# Altium PCB STM 32 F4 Robusta V1.PcbDoc (part 2 of 7)
Units mm, origin at the board's own origin, x right, y up, seen from the top; angles counter-clockwise.
Board outline 287.78 x 230 mm, 2 copper layers (Top Layer, Bottom Layer); 54 components, 96 nets, 355 pads, 16 vias.
Unrouted connection lines stored in the file: 3.
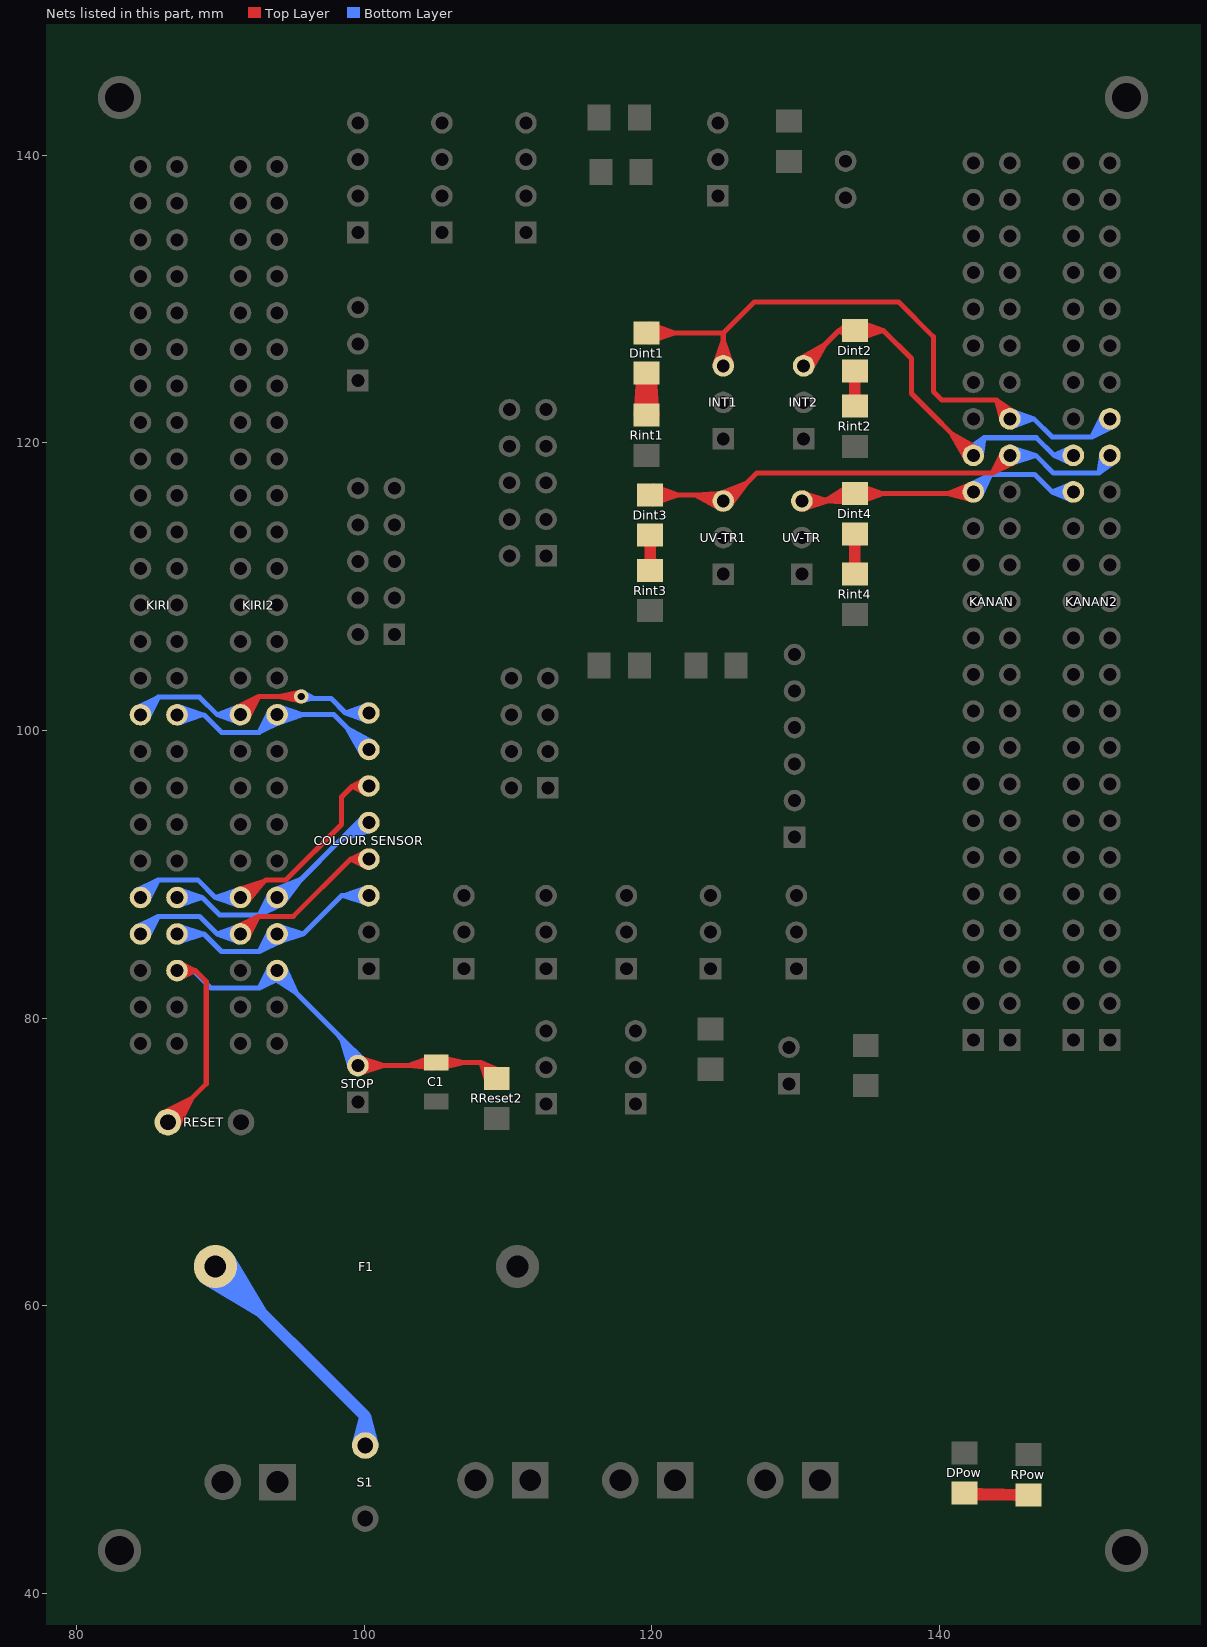
[diagram p2: the nets of this part, all layers, seen from the top]

## Via types
v1: diameter 1, hole 0.5, Top Layer to Bottom Layer, 13 vias
v2: diameter 0.8, hole 0.5, Top Layer to Bottom Layer, 3 vias

## Nets (pads, with @x,y where several pads share a name; then routed paths per layer and width w, separated by ;. In a path a pad name is that pad's centre, name@x,y a point inside that pad or via, vN(x,y) a via of type N, cw(c..) or ccw(c..) an arc to the next point about the centre after c; other vN are vias at no path point) (continued)
NetC1_2: C1.2 KIRI2.5 KIRI.5 RESET.2 RReset2.1 STOP.1 | length 232
  Top Layer w0.35: RESET.2@85.921,73.379 88.027,74.438 ; RESET.2@85.969,73.411 87.265,73.764 ; RESET.2@86.029,73.444 87.353,73.676 ; RESET.2@86.102,73.077 88.027,74.438 ; RESET.2@86.108,73.082 87.265,73.764 ; RESET.2@86.137,73.103 87.353,73.676 ; RESET.2@86.36,73.171 ccw(c86.36,74.137) 87.043,73.454 ccw(c87.726,72.771) RESET.2@86.76,72.771 ; RESET.2@86.36,73.521 ccw(c86.36,75.332) 87.64,74.051 ccw(c88.921,72.771) RESET.2@87.11,72.771 ; RESET.2@86.666,72.513 88.027,74.438 ; RESET.2@86.671,72.519 87.353,73.676 ; RESET.2@86.692,72.548 87.265,73.764 ; RESET.2@86.968,72.332 88.027,74.438 ; RESET.2@87,72.38 87.353,73.676 ; KIRI.5@87.008,83.087 87.907,83.253 ; KIRI.5@87.008,83.537 87.907,83.371 ; KIRI.5@87.015,83.088 88.265,83.312 ; KIRI.5@87.015,83.536 88.265,83.312 ; RESET.2@87.033,72.44 87.265,73.764 ; KIRI.5@87.037,83.091 87.907,83.371 ; KIRI.5@87.037,83.533 87.907,83.253 ; KIRI.5@87.125,82.752 88.265,83.312 ; KIRI.5@87.125,83.872 88.265,83.312 ; KIRI.5@87.14,82.756 87.907,83.253 ; KIRI.5@87.14,83.868 87.907,83.371 ; KIRI.5@87.211,82.779 87.907,83.371 ; KIRI.5@87.211,83.845 87.907,83.253 ; KIRI.5@87.427,82.933 cw(c88.265,82.197) 88.265,83.312 ; KIRI.5@87.427,83.691 ccw(c88.265,84.427) 88.265,83.312 ; STOP.1@99.603,76.486 100.597,76.755 ; STOP.1@99.603,76.93 100.597,76.661 ; STOP.1@99.66,76.14 101.368,76.708 ; STOP.1@99.66,77.276 101.368,76.708 ; STOP.1@99.703,76.149 100.597,76.661 ; STOP.1@99.703,77.267 100.597,76.755 ; STOP.1@99.754,76.164 100.597,76.755 ; STOP.1@99.754,77.252 100.597,76.661 ; STOP.1@99.975,76.301 cw(c100.956,75.32) 100.956,76.708 cw(c100.956,78.096) STOP.1@99.975,77.115 ; 103.324,76.708 ccw(c103.324,78.32) C1.2@104.464,77.18 ; 104.169,76.708 ccw(c104.169,77.475) C1.2@104.711,76.933 ; C1.2@104.603,77.268 103.741,76.763 ; C1.2@104.639,77.279 103.106,76.708 ; C1.2@104.716,76.54 103.741,76.763 ; C1.2@104.734,76.54 103.106,76.708 ; C1.2@104.822,76.708 STOP.1@99.568,76.708 ; C1.2@105.029,76.915 108.127,76.915 ; C1.2@105.373,76.543 106.929,76.915 ; C1.2@105.373,77.287 106.929,76.915 ; C1.2@105.417,76.55 106,76.884 ; C1.2@105.417,77.28 106,76.946 ; C1.2@105.45,76.56 106,76.946 ; C1.2@105.45,77.27 106,76.884 ; C1.2@105.594,76.65 cw(c106.234,76.01) 106.234,76.915 cw(c106.234,77.82) C1.2@105.594,77.18 ; 108.224,76.818 ccw(c109.12,77.714) RReset2.1@109.12,76.447 ; RReset2.1@108.498,75.882 ccw(c107.217,76.005) 108.127,76.915 ; RReset2.1@108.579,75.509 108.127,76.915 ; RReset2.1@108.9,75.657 108.127,76.915 ; RReset2.1@109.12,75.822 108.127,76.915 ; RReset2.1@109.22,75.822 108.127,76.915 ; RReset2.1@109.305,76.025 108.127,76.915 ; RReset2.1@109.483,76.331 108.127,76.915 ; RESET.2@86.36,72.771 87.353,73.676 ; RESET.2@86.36,72.771 87.265,73.764 ; RESET.2@86.36,72.771 89.027,75.438 89.027,82.55 88.265,83.312 ; KIRI.5@86.995,83.312 87.907,83.371 ; KIRI.5@86.995,83.312 87.907,83.253 ; KIRI.5@86.995,83.312 88.265,83.312 ; STOP.1@99.568,76.708 100.597,76.755 ; STOP.1@99.568,76.708 100.597,76.661 ; 100.597,76.661 99.582,76.483 101.368,76.708 ; 100.597,76.755 99.582,76.933 101.368,76.708 ; 103.106,76.708 104.729,76.915 103.741,76.763 ; C1.2@105.329,76.915 106.929,76.915 ; C1.2@105.329,76.915 106,76.946 ; C1.2@105.329,76.915 106,76.884
  Bottom Layer w0.35: KIRI.5@87.007,83.087 87.801,83.242 ; KIRI.5@87.007,83.537 87.801,83.382 ; KIRI.5@87.017,83.088 88.138,83.312 ; KIRI.5@87.017,83.536 88.138,83.312 ; KIRI.5@87.045,83.093 87.801,83.382 ; KIRI.5@87.045,83.531 87.801,83.242 ; KIRI.5@87.14,82.755 88.138,83.312 ; KIRI.5@87.14,83.869 88.138,83.312 ; KIRI.5@87.152,82.759 87.801,83.242 ; KIRI.5@87.152,83.865 87.801,83.382 ; KIRI.5@87.245,82.794 87.801,83.382 ; KIRI.5@87.245,83.83 87.801,83.242 ; KIRI.5@87.457,82.969 cw(c88.138,82.464) 88.138,83.312 ; KIRI.5@87.457,83.655 ccw(c88.138,84.16) 88.138,83.312 ; KIRI2.5@93.375,83.317 cw(c91.987,83.317) 92.968,82.335 cw(c93.95,81.354) 93.95,82.742 cw(c93.95,81.907) 94.541,82.497 ; KIRI2.5@93.434,83.57 93.256,82.556 ; KIRI2.5@93.459,83.617 93.189,82.623 ; KIRI2.5@93.482,83.65 92.725,82.092 ; KIRI2.5@93.568,82.887 95.321,81.717 ; KIRI2.5@93.609,82.854 94.785,82.347 ; KIRI2.5@93.768,83.45 93.256,82.556 ; KIRI2.5@93.787,83.162 95.321,81.717 ; KIRI2.5@93.793,83.156 94.785,82.347 ; KIRI2.5@94.083,83.135 93.189,82.623 ; KIRI2.5@94.128,83.454 95.321,81.717 ; KIRI2.5@94.133,83.448 94.785,82.347 ; KIRI2.5@94.175,83.317 ccw(c95.271,83.317) 94.496,82.542 ; KIRI2.5@94.203,82.801 93.189,82.623 ; KIRI2.5@94.25,82.826 93.256,82.556 ; KIRI2.5@94.283,82.849 92.725,82.092 ; KIRI2.5@94.434,83.628 95.321,81.717 ; KIRI2.5@94.459,83.585 94.785,82.347 ; KIRI2.5@94.525,83.317 ccw(c96.466,83.317) 95.093,81.945 ; 98.048,78.99 cw(c95.765,76.708) STOP.1@98.993,76.708 ; 98.645,78.393 cw(c96.96,76.708) STOP.1@99.343,76.708 ; STOP.1@99.005,76.59 99.024,77.899 ; STOP.1@99.015,76.865 99.487,77.477 ; STOP.1@99.04,76.481 98.561,78.322 ; STOP.1@99.041,76.478 98.425,78.613 ; 99.243,77.795 cw(c98.155,76.708) STOP.1@99.693,76.708 ; STOP.1@99.343,76.717 99.487,77.477 ; STOP.1@99.356,76.632 99.024,77.899 ; STOP.1@99.37,76.6 98.561,78.322 ; STOP.1@99.369,76.602 98.425,78.613 ; STOP.1@99.41,77.261 ccw(c99.351,77.47) 99.568,77.47 ; STOP.1@99.726,77.261 cw(c99.785,77.47) 99.568,77.47 ; STOP.1@99.751,76.838 98.561,78.322 ; STOP.1@99.755,76.833 98.425,78.613 ; STOP.1@99.764,76.819 99.024,77.899 ; STOP.1@99.786,76.764 99.487,77.477 ; STOP.1@100.004,77.083 98.561,78.322 ; STOP.1@100.019,77.065 98.425,78.613 ; STOP.1@100.026,77.056 99.024,77.899 ; STOP.1@100.076,76.977 99.487,77.477 ; KIRI.5@86.995,83.312 87.801,83.382 ; KIRI.5@86.995,83.312 87.801,83.242 ; KIRI.5@86.995,83.312 88.138,83.312 ; 88.138,83.312 89.358,82.092 92.725,82.092 ; 92.725,82.092 KIRI2.5@93.95,83.317 ; 92.725,82.092 93.781,83.465 93.189,82.623 ; 92.725,82.092 94.098,83.148 93.256,82.556 ; 92.725,82.092 KIRI2.5@93.95,83.317 ; 93.189,82.623 KIRI2.5@93.95,83.317 ; 93.256,82.556 KIRI2.5@93.95,83.317 ; KIRI2.5@93.95,83.317 95.321,81.717 ; KIRI2.5@93.95,83.317 94.785,82.347 ; KIRI2.5@93.95,83.317 93.95,83.088 99.568,77.47 ; 98.425,78.613 STOP.1@99.568,76.708 ; 98.561,78.322 STOP.1@99.568,76.708 ; 99.024,77.899 STOP.1@99.568,76.708 ; 99.487,77.477 STOP.1@99.568,76.708 ; STOP.1@99.568,76.708 99.568,77.47 ; STOP.1@99.568,76.708 99.568,77.47 ; 99.568,77.47 99.791,76.741 99.568,77.47 ; 99.568,77.47 99.345,76.741 99.568,77.47 ; 99.568,77.47 100.101,76.925 99.568,77.47 ; 99.568,77.47 99.035,76.925 99.568,77.47
"NetCOLOUR SENSOR_3": "COLOUR SENSOR.3" KIRI2.7 KIRI.7 | length 97.4
  Bottom Layer w0.35: KIRI.7@87.03,85.63 88.024,85.899 ; KIRI.7@87.03,86.074 88.024,85.805 ; KIRI.7@87.087,85.284 88.795,85.852 ; KIRI.7@87.087,86.42 88.795,85.852 ; KIRI.7@87.13,85.293 88.024,85.805 ; KIRI.7@87.13,86.411 88.024,85.899 ; KIRI.7@87.181,85.308 88.024,85.899 ; KIRI.7@87.181,86.396 88.024,85.805 ; KIRI.7@87.402,85.445 cw(c88.383,84.464) 88.383,85.852 cw(c88.383,87.24) KIRI.7@87.402,86.259 ; KIRI2.7@93.375,85.857 cw(c91.987,85.857) 92.968,84.875 cw(c93.95,83.894) KIRI2.7@93.95,85.282 ; KIRI2.7@93.434,86.11 93.256,85.096 ; KIRI2.7@93.459,86.157 93.189,85.163 ; KIRI2.7@93.482,86.19 92.725,84.632 ; KIRI2.7@93.768,85.99 93.256,85.096 ; KIRI2.7@93.964,85.632 95.75,85.857 ; KIRI2.7@93.964,86.082 95.75,85.857 ; KIRI2.7@93.964,85.632 94.979,85.81 ; KIRI2.7@93.964,86.082 94.979,85.904 ; KIRI2.7@93.985,85.635 94.979,85.904 ; KIRI2.7@93.985,86.079 94.979,85.81 ; KIRI2.7@94.042,85.289 95.75,85.857 ; KIRI2.7@94.042,86.425 95.75,85.857 ; KIRI2.7@94.083,85.675 93.189,85.163 ; KIRI2.7@94.085,85.298 94.979,85.81 ; KIRI2.7@94.085,86.416 94.979,85.904 ; KIRI2.7@94.136,85.313 94.979,85.904 ; KIRI2.7@94.136,86.401 94.979,85.81 ; KIRI2.7@94.203,85.341 93.189,85.163 ; KIRI2.7@94.25,85.366 93.256,85.096 ; KIRI2.7@94.283,85.389 92.725,84.632 ; KIRI2.7@94.357,85.45 cw(c95.338,84.469) 95.338,85.857 cw(c95.338,87.245) KIRI2.7@94.357,86.264 ; 99.923,88.112 ccw(c98.942,87.131) 98.942,88.519 ccw(c98.942,89.907) 99.923,88.926 ; 100.144,87.975 99.301,88.566 ; 100.144,89.063 99.301,88.472 ; 100.195,87.96 99.301,88.472 ; 100.195,89.078 99.301,88.566 ; 100.238,87.951 98.53,88.519 ; 100.238,89.087 98.53,88.519 ; 100.295,88.297 99.301,88.566 ; 100.295,88.741 99.301,88.472 ; KIRI.7@86.995,85.852 88.024,85.805 ; KIRI.7@86.995,85.852 88.024,85.899 ; KIRI.7@86.995,85.852 88.87,85.852 90.09,84.632 92.725,84.632 ; 88.024,85.805 87.009,85.627 88.795,85.852 ; 88.024,85.899 87.009,86.077 88.795,85.852 ; 92.725,84.632 KIRI2.7@93.95,85.857 ; 92.725,84.632 93.781,86.005 93.189,85.163 ; 92.725,84.632 94.098,85.688 93.256,85.096 ; 92.725,84.632 KIRI2.7@93.95,85.857 ; 93.189,85.163 KIRI2.7@93.95,85.857 ; 93.256,85.096 KIRI2.7@93.95,85.857 ; KIRI2.7@93.95,85.857 94.979,85.81 ; KIRI2.7@93.95,85.857 94.979,85.904 ; KIRI2.7@93.95,85.857 95.763,85.857 98.425,88.519 100.33,88.519 ; 98.53,88.519 100.33,88.519 ; 98.53,88.519 100.316,88.744 99.301,88.566 ; 98.53,88.519 100.316,88.294 99.301,88.472 ; 99.301,88.472 100.33,88.519 ; 99.301,88.566 100.33,88.519
"NetCOLOUR SENSOR_4": "COLOUR SENSOR.4" KIRI2.8 KIRI.8 | length 95.9
  Top Layer w0.35: KIRI2.8@91.077,86.325 92.635,87.082 ; KIRI2.8@91.11,86.348 92.104,86.618 ; KIRI2.8@91.156,86.373 92.171,86.551 ; KIRI2.8@91.277,86.039 92.171,86.551 ; KIRI2.8@91.41,86.432 ccw(c91.41,87.82) 92.392,86.839 ccw(c93.373,85.857) KIRI2.8@91.985,85.857 ; KIRI2.8@91.579,85.708 92.171,86.551 ; KIRI2.8@91.579,85.709 92.635,87.082 ; KIRI2.8@91.592,85.724 92.104,86.618 ; KIRI2.8@91.878,85.524 92.635,87.082 ; KIRI2.8@91.901,85.557 92.171,86.551 ; KIRI2.8@91.926,85.603 92.104,86.618 ; 99.898,90.68 ccw(c99.06,89.944) 99.06,91.059 ; 99.898,91.438 cw(c99.06,92.174) 99.06,91.059 ; 100.114,90.526 99.418,91.118 ; 100.114,91.592 99.418,91 ; 100.185,90.503 99.418,91 ; 100.185,91.615 99.418,91.118 ; 100.2,90.499 99.06,91.059 ; 100.2,91.619 99.06,91.059 ; 100.288,90.838 99.418,91.118 ; 100.288,91.28 99.418,91 ; 100.31,90.835 99.06,91.059 ; 100.31,91.283 99.06,91.059 ; 100.317,90.834 99.418,91 ; 100.317,91.284 99.418,91.118 ; KIRI2.8@91.41,85.857 92.104,86.618 ; KIRI2.8@91.41,85.857 92.171,86.551 ; KIRI2.8@91.41,85.857 92.635,87.082 ; 92.104,86.618 91.261,86.026 92.635,87.082 ; 92.635,87.082 95.083,87.082 99.06,91.059 ; 99.06,91.059 100.33,91.059 ; 99.06,91.059 100.33,91.059 ; 99.418,91 100.33,91.059 ; 99.418,91.118 100.33,91.059
  Bottom Layer w0.35: KIRI.8@84.122,86.32 85.68,87.077 ; KIRI.8@84.155,86.343 85.149,86.613 ; KIRI.8@84.202,86.368 85.216,86.546 ; KIRI.8@84.322,86.034 85.216,86.546 ; KIRI.8@84.455,86.427 ccw(c84.455,87.815) 85.437,86.834 ccw(c86.418,85.852) KIRI.8@85.03,85.852 ; KIRI.8@84.637,85.719 85.149,86.613 ; KIRI.8@84.923,85.519 85.68,87.077 ; KIRI.8@84.946,85.552 85.216,86.546 ; KIRI.8@84.971,85.599 85.149,86.613 ; KIRI2.8@91.003,85.45 ccw(c90.022,84.469) 90.022,85.857 ccw(c90.022,87.245) KIRI2.8@91.003,86.264 ; KIRI2.8@91.224,85.313 90.381,85.904 ; KIRI2.8@91.224,86.401 90.381,85.81 ; KIRI2.8@91.275,85.298 90.381,85.81 ; KIRI2.8@91.275,86.416 90.381,85.904 ; KIRI2.8@91.308,85.291 89.784,85.857 ; KIRI2.8@91.308,86.423 89.784,85.857 ; KIRI2.8@91.375,85.635 90.381,85.904 ; KIRI2.8@91.375,86.079 90.381,85.81 ; KIRI2.8@91.394,85.633 89.784,85.857 ; KIRI2.8@91.394,86.081 89.784,85.857 ; KIRI2.8@91.396,85.632 90.381,85.81 ; KIRI2.8@91.396,86.082 90.381,85.904 ; KIRI.8@84.455,85.852 85.149,86.613 ; KIRI.8@84.455,85.852 85.216,86.546 ; KIRI.8@84.455,85.852 85.68,87.077 ; 85.149,86.613 84.306,86.021 85.68,87.077 ; 85.216,86.546 84.624,85.703 85.68,87.077 ; 85.68,87.077 88.564,87.077 89.784,85.857 ; 89.784,85.857 KIRI2.8@91.41,85.857 ; 89.784,85.857 KIRI2.8@91.41,85.857 ; 90.381,85.81 KIRI2.8@91.41,85.857 ; 90.381,85.904 KIRI2.8@91.41,85.857
"NetCOLOUR SENSOR_5": "COLOUR SENSOR.5" KIRI2.9 KIRI.9 | length 126.8
  Bottom Layer w0.35: KIRI.9@87.03,88.17 88.024,88.439 ; KIRI.9@87.03,88.614 88.024,88.345 ; KIRI.9@87.09,87.825 88.743,88.392 ; KIRI.9@87.09,88.959 88.743,88.392 ; KIRI.9@87.13,87.833 88.024,88.345 ; KIRI.9@87.13,88.951 88.024,88.439 ; KIRI.9@87.181,87.848 88.024,88.439 ; KIRI.9@87.181,88.936 88.024,88.345 ; KIRI.9@87.402,87.985 cw(c88.383,87.004) 88.383,88.392 cw(c88.383,89.78) KIRI.9@87.402,88.799 ; KIRI2.9@93.375,88.397 cw(c91.987,88.397) 92.968,87.415 cw(c93.95,86.434) KIRI2.9@93.95,87.822 ; KIRI2.9@93.434,88.65 93.256,87.636 ; KIRI2.9@93.459,88.697 93.189,87.703 ; KIRI2.9@93.482,88.73 92.725,87.172 ; KIRI2.9@93.668,88.898 95.653,89.684 ; KIRI2.9@93.7,88.915 95.146,89.293 ; KIRI2.9@93.768,88.53 93.256,87.636 ; KIRI2.9@93.824,88.583 95.653,89.684 ; KIRI2.9@93.829,88.587 95.146,89.293 ; KIRI2.9@93.847,88.963 94.724,88.829 ; KIRI2.9@93.866,88.606 94.724,88.829 ; KIRI2.9@93.95,88.622 ccw(c93.95,90.169) 95.044,89.075 ; KIRI2.9@93.95,88.972 ccw(c93.95,91.364) 95.642,89.673 ; KIRI2.9@94.083,88.215 93.189,87.703 ; KIRI2.9@94.084,88.216 94.724,88.829 ; KIRI2.9@94.095,88.225 95.653,89.684 ; KIRI2.9@94.098,88.228 95.146,89.293 ; KIRI2.9@94.203,87.881 93.189,87.703 ; KIRI2.9@94.25,87.906 93.256,87.636 ; KIRI2.9@94.283,87.929 92.725,87.172 ; KIRI2.9@94.355,87.989 95.653,89.684 ; KIRI2.9@94.377,88.012 95.146,89.293 ; KIRI2.9@94.378,88.013 94.724,88.829 ; 98.048,92.079 cw(c100.33,89.796) 100.33,93.024 ; 98.645,92.676 cw(c100.33,90.991) 100.33,93.374 ; 99.243,93.274 cw(c100.33,92.186) 100.33,93.724 ; 99.777,93.441 ccw(c99.568,93.382) 99.568,93.599 ; 99.777,93.757 cw(c99.568,93.816) 99.568,93.599 ; 99.955,94.035 98.716,92.592 ; 99.973,94.05 98.429,92.46 ; 99.982,94.057 99.139,93.055 ; 100.061,94.107 99.561,93.518 ; 100.173,93.046 99.561,93.518 ; 100.2,93.782 98.716,92.592 ; 100.205,93.786 98.429,92.46 ; 100.219,93.795 99.139,93.055 ; 100.274,93.817 99.561,93.518 ; 100.321,93.374 99.561,93.518 ; 100.406,93.387 99.139,93.055 ; 100.436,93.4 98.429,92.46 ; 100.438,93.401 98.716,92.592 ; 100.448,93.036 99.139,93.055 ; 100.557,93.071 98.716,92.592 ; 100.559,93.072 98.429,92.46 ; KIRI.9@86.995,88.392 88.024,88.439 ; KIRI.9@86.995,88.392 88.024,88.345 ; KIRI.9@86.995,88.392 88.743,88.392 ; 88.024,88.345 87.009,88.167 88.743,88.392 ; 88.024,88.439 87.009,88.617 88.743,88.392 ; 88.743,88.392 89.963,87.172 92.725,87.172 ; 92.725,87.172 KIRI2.9@93.95,88.397 ; 92.725,87.172 93.781,88.545 93.189,87.703 ; 92.725,87.172 94.098,88.228 93.256,87.636 ; 92.725,87.172 KIRI2.9@93.95,88.397 ; 93.189,87.703 KIRI2.9@93.95,88.397 ; 93.256,87.636 KIRI2.9@93.95,88.397 ; KIRI2.9@93.95,88.397 95.653,89.684 ; KIRI2.9@93.95,88.397 95.146,89.293 ; KIRI2.9@93.95,88.397 94.724,88.829 ; KIRI2.9@93.95,88.397 94.366,88.397 99.568,93.599 ; 98.429,92.46 100.33,93.599 ; 98.716,92.592 100.33,93.599 ; 99.139,93.055 100.33,93.599 ; 99.561,93.518 100.33,93.599 ; 99.568,93.599 100.33,93.599 ; 99.568,93.599 100.297,93.822 99.568,93.599 ; 99.568,93.599 100.297,93.376 99.568,93.599 ; 99.568,93.599 100.113,94.132 99.568,93.599 ; 99.568,93.599 100.113,93.066 99.568,93.599 ; 99.568,93.599 100.33,93.599
"NetCOLOUR SENSOR_6": "COLOUR SENSOR.6" KIRI2.10 KIRI.10 | length 101.1
  Top Layer w0.35: KIRI2.10@91.158,88.914 93.091,89.535 ; KIRI2.10@91.189,88.928 92.585,89.197 ; KIRI2.10@91.294,88.59 93.091,89.535 ; KIRI2.10@91.298,88.592 92.585,89.197 ; KIRI2.10@91.34,88.611 92.218,88.779 ; KIRI2.10@91.344,88.968 92.218,88.779 ; KIRI2.10@91.425,88.621 ccw(c91.527,90.18) 92.632,89.076 ; KIRI2.10@91.448,88.971 ccw(c91.594,91.206) 93.178,89.622 ; KIRI2.10@91.531,88.207 92.218,88.779 ; KIRI2.10@91.546,88.218 93.091,89.535 ; KIRI2.10@91.551,88.222 92.585,89.197 ; KIRI2.10@91.797,87.971 93.091,89.535 ; KIRI2.10@91.81,87.984 92.218,88.779 ; KIRI2.10@91.823,87.997 92.585,89.197 ; 99.868,95.796 ccw(c99.187,95.291) 99.187,96.139 ; 99.868,96.482 cw(c99.187,96.987) 99.187,96.139 ; 100.08,95.621 99.524,96.209 ; 100.08,96.657 99.524,96.069 ; 100.173,95.586 99.524,96.069 ; 100.173,96.692 99.524,96.209 ; 100.185,95.582 99.187,96.139 ; 100.185,96.696 99.187,96.139 ; 100.28,95.92 99.524,96.209 ; 100.28,96.358 99.524,96.069 ; 100.308,95.915 99.187,96.139 ; 100.308,96.363 99.187,96.139 ; 100.318,95.914 99.524,96.069 ; 100.318,96.364 99.524,96.209 ; KIRI2.10@91.41,88.397 92.585,89.197 ; KIRI2.10@91.41,88.397 92.218,88.779 ; KIRI2.10@91.41,88.397 93.091,89.535 ; KIRI2.10@91.41,88.397 91.953,88.397 93.178,89.622 ; 93.178,89.622 94.575,89.622 98.425,93.472 98.425,95.377 99.187,96.139 ; 99.187,96.139 100.33,96.139 ; 99.524,96.069 100.33,96.139 ; 99.524,96.209 100.33,96.139
  Bottom Layer w0.35: KIRI.10@84.122,88.86 85.68,89.617 ; KIRI.10@84.155,88.883 85.149,89.153 ; KIRI.10@84.202,88.908 85.216,89.086 ; KIRI.10@84.322,88.574 85.216,89.086 ; KIRI.10@84.455,88.967 ccw(c84.455,90.355) 85.437,89.374 ccw(c86.418,88.392) KIRI.10@85.03,88.392 ; KIRI.10@84.637,88.259 85.149,89.153 ; KIRI.10@84.923,88.059 85.68,89.617 ; KIRI.10@84.946,88.092 85.216,89.086 ; KIRI.10@84.971,88.139 85.149,89.153 ; KIRI2.10@91.003,87.99 ccw(c90.022,87.009) 90.022,88.397 ccw(c90.022,89.785) KIRI2.10@91.003,88.804 ; KIRI2.10@91.224,87.853 90.381,88.444 ; KIRI2.10@91.224,88.941 90.381,88.35 ; KIRI2.10@91.275,87.838 90.381,88.35 ; KIRI2.10@91.275,88.956 90.381,88.444 ; KIRI2.10@91.316,87.83 89.657,88.397 ; KIRI2.10@91.316,88.964 89.657,88.397 ; KIRI2.10@91.375,88.175 90.381,88.444 ; KIRI2.10@91.375,88.619 90.381,88.35 ; KIRI.10@84.455,88.392 85.149,89.153 ; KIRI.10@84.455,88.392 85.216,89.086 ; KIRI.10@84.455,88.392 85.68,89.617 ; 85.149,89.153 84.306,88.561 85.68,89.617 ; 85.216,89.086 84.624,88.243 85.68,89.617 ; 85.68,89.617 88.437,89.617 89.657,88.397 ; 89.657,88.397 KIRI2.10@91.41,88.397 ; 89.657,88.397 91.396,88.622 90.381,88.444 ; 89.657,88.397 91.396,88.172 90.381,88.35 ; 89.657,88.397 KIRI2.10@91.41,88.397 ; 90.381,88.35 KIRI2.10@91.41,88.397 ; 90.381,88.444 KIRI2.10@91.41,88.397
"NetCOLOUR SENSOR_7": "COLOUR SENSOR.7" KIRI2.19 KIRI.19 | length 98.9
  Bottom Layer w0.35: KIRI.19@87.03,100.87 88.024,101.139 ; KIRI.19@87.03,101.314 88.024,101.045 ; KIRI.19@87.087,100.524 88.795,101.092 ; KIRI.19@87.087,101.66 88.795,101.092 ; KIRI.19@87.13,100.533 88.024,101.045 ; KIRI.19@87.13,101.651 88.024,101.139 ; KIRI.19@87.181,100.548 88.024,101.139 ; KIRI.19@87.181,101.636 88.024,101.045 ; KIRI.19@87.402,100.685 cw(c88.383,99.704) 88.383,101.092 cw(c88.383,102.48) KIRI.19@87.402,101.499 ; KIRI2.19@93.375,101.097 cw(c91.987,101.097) 92.968,100.115 cw(c93.95,99.134) KIRI2.19@93.95,100.522 ; KIRI2.19@93.434,101.35 93.256,100.336 ; KIRI2.19@93.459,101.397 93.189,100.403 ; KIRI2.19@93.482,101.43 92.725,99.872 ; KIRI2.19@93.768,101.23 93.256,100.336 ; KIRI2.19@93.964,100.872 95.75,101.097 ; KIRI2.19@93.964,101.322 95.75,101.097 ; KIRI2.19@93.964,100.872 94.979,101.05 ; KIRI2.19@93.964,101.322 94.979,101.144 ; KIRI2.19@93.985,100.875 94.979,101.144 ; KIRI2.19@93.985,101.319 94.979,101.05 ; KIRI2.19@94.042,100.529 95.75,101.097 ; KIRI2.19@94.042,101.665 95.75,101.097 ; KIRI2.19@94.083,100.915 93.189,100.403 ; KIRI2.19@94.085,100.538 94.979,101.05 ; KIRI2.19@94.085,101.656 94.979,101.144 ; KIRI2.19@94.136,100.553 94.979,101.144 ; KIRI2.19@94.136,101.641 94.979,101.05 ; KIRI2.19@94.203,100.581 93.189,100.403 ; KIRI2.19@94.25,100.606 93.256,100.336 ; KIRI2.19@94.283,100.629 92.725,99.872 ; KIRI2.19@94.357,100.69 cw(c95.338,99.709) 95.338,101.097 cw(c95.338,102.485) KIRI2.19@94.357,101.504 ; 99.755,98.679 ccw(c98.367,98.679) 99.348,99.661 ccw(c100.33,100.642) 100.33,99.254 ; 99.814,98.426 99.636,99.44 ; 99.839,98.379 99.569,99.373 ; 99.872,98.332 98.838,100.171 ; 100.148,98.546 99.636,99.44 ; 100.161,98.53 99.569,99.373 ; 100.163,98.529 98.838,100.171 ; 100.463,98.861 99.569,99.373 ; 100.479,98.848 99.636,99.44 ; 100.48,98.846 98.838,100.171 ; 100.583,99.195 99.569,99.373 ; 100.63,99.17 99.636,99.44 ; 100.677,99.137 98.838,100.171 ; KIRI.19@86.995,101.092 88.024,101.139 ; KIRI.19@86.995,101.092 88.024,101.045 ; KIRI.19@86.995,101.092 88.87,101.092 90.09,99.872 92.725,99.872 ; 88.024,101.045 87.009,100.867 88.795,101.092 ; 88.024,101.139 87.009,101.317 88.795,101.092 ; 92.725,99.872 KIRI2.19@93.95,101.097 ; 92.725,99.872 93.781,101.245 93.189,100.403 ; 92.725,99.872 94.098,100.928 93.256,100.336 ; 92.725,99.872 KIRI2.19@93.95,101.097 ; 93.189,100.403 KIRI2.19@93.95,101.097 ; 93.256,100.336 KIRI2.19@93.95,101.097 ; KIRI2.19@93.95,101.097 94.979,101.144 ; KIRI2.19@93.95,101.097 94.979,101.05 ; KIRI2.19@93.95,101.097 97.912,101.097 100.33,98.679 ; 98.838,100.171 100.33,98.679 ; 99.569,99.373 100.33,98.679 ; 99.636,99.44 100.33,98.679
"NetCOLOUR SENSOR_8": "COLOUR SENSOR.8" KIRI2.20 KIRI.20 | length 110.9
  Top Layer w0.35: KIRI2.20@91.074,101.564 92.675,102.362 ; KIRI2.20@91.11,101.588 92.104,101.858 ; KIRI2.20@91.156,101.613 92.171,101.791 ; KIRI2.20@91.277,101.279 92.171,101.791 ; KIRI2.20@91.41,101.672 ccw(c91.41,103.06) 92.392,102.079 ccw(c93.373,101.097) KIRI2.20@91.985,101.097 ; KIRI2.20@91.592,100.964 92.104,101.858 ; KIRI2.20@91.877,100.761 92.675,102.362 ; KIRI2.20@91.901,100.797 92.171,101.791 ; KIRI2.20@91.926,100.843 92.104,101.858 ; v1@95.401,102.132 ccw(c94.846,101.577) 94.846,102.362 ccw(c94.846,103.147) v1@95.401,102.592 ; v1@95.526,102.054 95.049,102.389 ; v1@95.526,102.67 95.049,102.335 ; v1@95.555,102.046 95.049,102.335 ; v1@95.555,102.678 95.049,102.389 ; v1@95.597,102.039 94.081,102.362 ; v1@95.597,102.685 94.081,102.362 ; KIRI2.20@91.41,101.097 92.104,101.858 ; KIRI2.20@91.41,101.097 92.171,101.791 ; KIRI2.20@91.41,101.097 92.675,102.362 ; 92.104,101.858 91.261,101.266 92.675,102.362 ; 92.171,101.791 91.579,100.948 92.675,102.362 ; 92.675,102.362 v1(95.631,102.362) ; 94.081,102.362 v1(95.631,102.362) ; 95.049,102.335 v1(95.631,102.362) ; 95.049,102.389 v1(95.631,102.362)
  Bottom Layer w0.35: KIRI.20@84.122,101.56 85.68,102.317 ; KIRI.20@84.155,101.583 85.149,101.853 ; KIRI.20@84.202,101.608 85.216,101.786 ; KIRI.20@84.322,101.274 85.216,101.786 ; KIRI.20@84.455,101.667 ccw(c84.455,103.055) 85.437,102.074 ccw(c86.418,101.092) KIRI.20@85.03,101.092 ; KIRI.20@84.637,100.959 85.149,101.853 ; KIRI.20@84.923,100.759 85.68,102.317 ; KIRI.20@84.946,100.792 85.216,101.786 ; KIRI.20@84.971,100.839 85.149,101.853 ; KIRI2.20@91.003,100.69 ccw(c90.022,99.709) 90.022,101.097 ccw(c90.022,102.485) KIRI2.20@91.003,101.504 ; KIRI2.20@91.224,100.553 90.381,101.144 ; KIRI2.20@91.224,101.641 90.381,101.05 ; KIRI2.20@91.275,100.538 90.381,101.05 ; KIRI2.20@91.275,101.656 90.381,101.144 ; KIRI2.20@91.308,100.531 89.784,101.097 ; KIRI2.20@91.308,101.663 89.784,101.097 ; KIRI2.20@91.375,100.875 90.381,101.144 ; KIRI2.20@91.375,101.319 90.381,101.05 ; KIRI2.20@91.394,100.873 89.784,101.097 ; KIRI2.20@91.394,101.321 89.784,101.097 ; KIRI2.20@91.396,100.872 90.381,101.05 ; KIRI2.20@91.396,101.322 90.381,101.144 ; v1@95.657,102.038 96.43,102.263 ; v1@95.735,102.67 96.43,102.263 ; v1@95.861,102.592 ccw(c96.758,103.489) 96.758,102.22 ; 99.923,100.812 ccw(c98.942,99.831) 98.942,101.219 ccw(c98.942,102.607) 99.923,101.626 ; 100.144,100.675 99.301,101.266 ; 100.144,101.763 99.301,101.172 ; 100.195,100.66 99.301,101.172 ; 100.195,101.778 99.301,101.266 ; 100.228,100.653 98.709,101.219 ; 100.228,101.785 98.709,101.219 ; 100.295,100.997 99.301,101.266 ; 100.295,101.441 99.301,101.172 ; 100.314,100.995 98.709,101.219 ; 100.314,101.443 98.709,101.219 ; 100.316,100.994 99.301,101.172 ; 100.316,101.444 99.301,101.266 ; KIRI.20@84.455,101.092 85.149,101.853 ; KIRI.20@84.455,101.092 85.216,101.786 ; KIRI.20@84.455,101.092 85.68,102.317 ; 85.149,101.853 84.306,101.261 85.68,102.317 ; 85.216,101.786 84.624,100.943 85.68,102.317 ; 85.68,102.317 88.564,102.317 89.784,101.097 ; 89.784,101.097 KIRI2.20@91.41,101.097 ; 89.784,101.097 KIRI2.20@91.41,101.097 ; 90.381,101.05 KIRI2.20@91.41,101.097 ; 90.381,101.144 KIRI2.20@91.41,101.097 ; 96.43,102.263 v1(95.631,102.362) 95.773,102.22 97.708,102.22 98.709,101.219 ; 98.709,101.219 100.33,101.219 ; 98.709,101.219 100.33,101.219 ; 99.301,101.172 100.33,101.219 ; 99.301,101.266 100.33,101.219
NetDint1_1: Dint1.1 Rint1.2 | length 43.5
  Top Layer w0.6: Rint1.2@119.034,121.905 Dint1.1@119.193,124.5 ; Rint1.2@119.136,121.971 119.634,124.523 Rint1.2@120.132,121.971 ; Dint1.1@119.136,124.79 119.634,122.238 Dint1.1@120.132,124.79 ; Rint1.2@119.148,122.04 119.593,122.818 ; Dint1.1@119.148,124.721 119.593,123.943 ; Rint1.2@119.161,122.084 119.675,122.818 ; Dint1.1@119.161,124.677 119.675,123.943 ; Rint1.2@119.247,122.036 Dint1.1@120.075,124.5 ; Rint1.2@119.28,122.277 ccw(c118.427,123.13) 119.634,123.13 ccw(c120.841,123.13) Rint1.2@119.988,122.277 ; Dint1.1@119.28,124.484 cw(c118.427,123.631) 119.634,123.631 cw(c120.841,123.631) Dint1.1@119.988,124.484 ; Rint1.2@119.534,121.923 Dint1.1@119.193,124.5 ; Rint1.2@119.734,121.923 Dint1.1@120.075,124.5 ; Rint1.2@120.021,122.036 Dint1.1@119.193,124.5 ; Rint1.2@120.107,122.084 119.593,122.818 ; Dint1.1@120.107,124.677 119.593,123.943 ; Rint1.2@120.12,122.04 119.675,122.818 ; Dint1.1@120.12,124.721 119.675,123.943 ; Rint1.2@120.234,121.905 Dint1.1@120.075,124.5 ; 119.593,122.818 Rint1.2@119.634,121.923 ; 119.593,123.943 Dint1.1@119.634,124.838 ; Rint1.2@119.634,121.923 119.675,122.818 ; Rint1.2@119.634,121.923 Dint1.1@119.634,124.838 ; Dint1.1@119.634,124.838 119.675,123.943
NetDint1_2: Dint1.2 INT1.3 KANAN2.35 KANAN.35 | length 140.9
  Top Layer w0.35: Dint1.2@119.634,127.638 124.968,127.638 ; Dint1.2@119.78,127.367 120.852,127.689 ; Dint1.2@119.78,127.909 120.852,127.587 ; Dint1.2@119.84,127.022 121.584,127.638 ; Dint1.2@119.84,128.254 121.584,127.638 ; Dint1.2@119.881,127.03 120.852,127.587 ; Dint1.2@119.881,128.246 120.852,127.689 ; Dint1.2@119.936,127.046 120.852,127.689 ; Dint1.2@119.936,128.23 120.852,127.587 ; Dint1.2@120.176,127.196 cw(c121.243,126.129) 121.243,127.638 cw(c121.243,129.147) Dint1.2@120.176,128.08 ; INT1.3@124.4,125.441 124.968,127.149 ; INT1.3@124.409,125.484 124.921,126.378 ; INT1.3@124.424,125.535 125.015,126.378 ; INT1.3@124.561,125.756 ccw(c123.58,126.737) 124.968,126.737 ccw(c126.356,126.737) INT1.3@125.375,125.756 ; INT1.3@124.746,125.384 125.015,126.378 ; INT1.3@125.19,125.384 124.921,126.378 ; INT1.3@125.512,125.535 124.921,126.378 ; INT1.3@125.527,125.484 125.015,126.378 ; INT1.3@125.536,125.441 124.968,127.149 ; KANAN.35@144.327,121.785 ccw(c143.049,122.057) 143.973,122.981 ; KANAN.35@144.35,121.468 144.292,122.461 ; KANAN.35@144.367,121.427 143.973,122.981 ; 144.429,122.525 cw(c143.801,121.897) KANAN.35@144.67,121.713 ; 144.588,122.366 ccw(c144.89,122.668) KANAN.35@144.89,122.241 ; KANAN.35@144.696,121.552 144.292,122.461 ; KANAN.35@144.697,121.551 143.973,122.981 ; KANAN.35@145.053,121.821 144.292,122.461 ; KANAN.35@145.065,121.807 143.973,122.981 ; KANAN.35@145.23,122.13 144.292,122.461 ; KANAN.35@145.295,122.074 143.973,122.981 ; Dint1.2@119.734,127.638 121.584,127.638 ; Dint1.2@119.734,127.638 120.852,127.689 ; Dint1.2@119.734,127.638 120.852,127.587 ; 120.852,127.587 119.755,127.364 121.584,127.638 ; 120.852,127.689 119.755,127.912 121.584,127.638 ; 124.921,126.378 INT1.3@124.968,125.349 ; 124.921,126.378 124.743,125.363 124.968,127.149 ; INT1.3@124.968,125.349 125.015,126.378 ; INT1.3@124.968,125.349 124.968,127.635 127.127,129.794 137.16,129.794 139.573,127.381 139.573,123.571 140.163,122.981 143.973,122.981 ; 124.968,127.149 125.193,125.363 125.015,126.378 ; 143.973,122.981 KANAN.35@144.89,121.666 ; 143.973,122.981 144.89,122.064 KANAN.35@144.89,121.666 ; 144.292,122.461 KANAN.35@144.89,121.666
  Bottom Layer w0.35: KANAN.35@144.904,121.441 145.919,121.619 ; KANAN.35@144.904,121.891 145.919,121.713 ; KANAN.35@144.905,121.442 146.558,121.666 ; KANAN.35@144.905,121.89 146.558,121.666 ; KANAN.35@144.925,121.444 145.919,121.713 ; KANAN.35@144.925,121.888 145.919,121.619 ; KANAN.35@144.989,121.1 146.558,121.666 ; KANAN.35@144.989,122.232 146.558,121.666 ; KANAN.35@145.025,121.107 145.919,121.619 ; KANAN.35@145.025,122.225 145.919,121.713 ; KANAN.35@145.076,121.122 145.919,121.713 ; KANAN.35@145.076,122.21 145.919,121.619 ; KANAN.35@145.297,121.259 cw(c146.278,120.278) 146.278,121.666 cw(c146.278,123.054) KANAN.35@145.297,122.073 ; KANAN2.35@151.27,121.666 cw(c149.882,121.666) 150.863,120.684 cw(c151.845,119.703) KANAN2.35@151.845,121.091 ; KANAN2.35@151.329,121.919 151.151,120.905 ; KANAN2.35@151.354,121.966 151.084,120.972 ; KANAN2.35@151.379,122.002 150.575,120.396 ; KANAN2.35@151.663,121.799 151.151,120.905 ; KANAN2.35@151.978,121.484 151.084,120.972 ; KANAN2.35@152.099,121.15 151.084,120.972 ; KANAN2.35@152.145,121.175 151.151,120.905 ; KANAN2.35@152.181,121.2 150.575,120.396 ; KANAN.35@144.89,121.666 145.919,121.713 ; KANAN.35@144.89,121.666 145.919,121.619 ; KANAN.35@144.89,121.666 146.558,121.666 ; 146.558,121.666 147.828,120.396 150.575,120.396 ; 150.575,120.396 KANAN2.35@151.845,121.666 ; 150.575,120.396 151.676,121.815 151.084,120.972 ; 150.575,120.396 151.994,121.497 151.151,120.905 ; 150.575,120.396 KANAN2.35@151.845,121.666 ; 151.084,120.972 KANAN2.35@151.845,121.666 ; 151.151,120.905 KANAN2.35@151.845,121.666
NetDint2_1: Dint2.1 Rint2.2 | length 7.9
  Top Layer w0.8: Rint2.2@133.829,122.841 ccw(c133.146,123.524) 134.112,123.524 ccw(c135.078,123.524) Rint2.2@134.395,122.841 ; Dint2.1@133.829,124.724 cw(c133.146,124.042) 134.112,124.042 cw(c135.078,124.042) Dint2.1@134.395,124.724 ; Rint2.2@134.112,122.558 Dint2.1@134.112,125.007 Rint2.2@134.112,122.558
NetDint2_2: Dint2.2 INT2.3 KANAN2.34 KANAN.34 | length 126.7
  Top Layer w0.35: INT2.3@130.209,125.807 132.048,126.841 ; INT2.3@130.256,125.84 131.25,126.11 ; INT2.3@130.303,125.865 131.317,126.043 ; INT2.3@130.406,125.516 132.048,126.841 ; INT2.3@130.407,125.518 131.25,126.11 ; INT2.3@130.423,125.531 131.317,126.043 ; INT2.3@130.556,125.924 ccw(c130.556,127.312) 131.538,126.331 ccw(c132.519,125.349) INT2.3@131.131,125.349 ; INT2.3@130.723,125.199 132.048,126.841 ; INT2.3@130.725,125.2 131.317,126.043 ; INT2.3@130.738,125.216 131.25,126.11 ; INT2.3@131.014,125.002 132.048,126.841 ; INT2.3@131.047,125.049 131.317,126.043 ; INT2.3@131.072,125.096 131.25,126.11 ; Dint2.2@133.45,127.535 ccw(c133.014,127.324) 133.014,127.807 ; Dint2.2@133.45,128.08 cw(c133.014,128.291) 133.014,127.807 ; Dint2.2@133.816,127.214 133.014,127.807 ; Dint2.2@133.816,128.401 133.014,127.807 ; Dint2.2@133.974,127.535 133.014,127.807 ; Dint2.2@133.974,128.08 133.014,127.807 ; Dint2.2@134.012,127.807 133.014,127.807 ; Dint2.2@134.258,127.536 135.33,127.859 ; Dint2.2@134.258,128.078 135.33,127.756 ; Dint2.2@134.318,127.191 136.062,127.807 ; Dint2.2@134.318,128.423 136.062,127.807 ; Dint2.2@134.359,127.2 135.33,127.756 ; Dint2.2@134.359,128.415 135.33,127.859 ; Dint2.2@134.414,127.216 135.33,127.859 ; Dint2.2@134.414,128.399 135.33,127.756 ; Dint2.2@134.654,127.365 cw(c135.721,126.298) 135.721,127.807 cw(c135.721,129.316) Dint2.2@134.654,128.249 ; KANAN.34@141.775,119.126 ccw(c140.387,119.126) 141.368,120.108 ccw(c142.35,121.089) KANAN.34@142.35,119.701 ; KANAN.34@141.834,118.873 141.656,119.887 ; KANAN.34@141.859,118.826 141.589,119.82 ; KANAN.34@141.892,118.779 140.858,120.618 ; KANAN.34@142.168,118.993 141.656,119.887 ; KANAN.34@142.181,118.977 141.589,119.82 ; KANAN.34@142.183,118.976 140.858,120.618 ; KANAN.34@142.483,119.308 141.589,119.82 ; KANAN.34@142.499,119.295 141.656,119.887 ; KANAN.34@142.5,119.293 140.858,120.618 ; KANAN.34@142.603,119.642 141.589,119.82 ; KANAN.34@142.65,119.617 141.656,119.887 ; KANAN.34@142.697,119.584 140.858,120.618 ; INT2.3@130.556,125.349 131.25,126.11 ; INT2.3@130.556,125.349 131.317,126.043 ; INT2.3@130.556,125.349 133.014,127.807 ; 133.014,127.807 Dint2.2@134.112,127.807 136.099,127.807 138.049,125.857 138.049,123.427 KANAN.34@142.35,119.126 ; Dint2.2@134.212,127.807 136.062,127.807 ; Dint2.2@134.212,127.807 135.33,127.859 ; Dint2.2@134.212,127.807 135.33,127.756 ; 135.33,127.756 134.233,127.533 136.062,127.807 ; 135.33,127.859 134.233,128.082 136.062,127.807 ; 140.858,120.618 KANAN.34@142.35,119.126 ; 141.589,119.82 KANAN.34@142.35,119.126 ; 141.656,119.887 KANAN.34@142.35,119.126
  Bottom Layer w0.35: KANAN.34@141.926,119.515 143.084,120.351 ; KANAN.34@142.167,119.256 143.084,120.351 ; KANAN.34@142.552,119.026 143.084,120.351 ; KANAN.34@142.558,119.211 cw(c143.212,119.48) 142.712,119.979 ; KANAN.34@142.882,119.344 cw(c143.739,119.696) 143.084,120.351 ; KANAN.34@142.893,118.936 143.084,120.351 ; KANAN2.34@148.89,118.728 ccw(c147.955,117.829) 147.955,119.126 ; KANAN2.34@148.89,119.524 cw(c147.955,120.423) 147.955,119.126 ; KANAN2.34@149.11,118.585 148.316,119.177 ; KANAN2.34@149.11,119.667 148.316,119.075 ; KANAN2.34@149.167,118.568 148.316,119.075 ; KANAN2.34@149.167,119.684 148.316,119.177 ; KANAN2.34@149.183,118.564 147.955,119.126 ; KANAN2.34@149.183,119.688 147.955,119.126 ; KANAN2.34@149.268,118.904 148.316,119.177 ; KANAN2.34@149.268,119.348 148.316,119.075 ; KANAN2.34@149.286,118.902 147.955,119.126 ; KANAN2.34@149.286,119.35 147.955,119.126 ; KANAN2.34@149.291,118.901 148.316,119.075 ; KANAN2.34@149.291,119.351 148.316,119.177 ; 143.084,120.351 KANAN.34@142.35,119.126 142.35,119.617 143.084,120.351 ; 143.084,120.351 146.73,120.351 147.955,119.126 ; 147.955,119.126 KANAN2.34@149.305,119.126 ; 147.955,119.126 KANAN2.34@149.305,119.126 ; 148.316,119.075 KANAN2.34@149.305,119.126 ; 148.316,119.177 KANAN2.34@149.305,119.126
NetDint3_1: Dint3.1 Rint3.2 | length 7.9
  Top Layer w0.8: Rint3.2@119.605,111.411 ccw(c118.922,112.094) 119.888,112.094 ccw(c120.854,112.094) Rint3.2@120.171,111.411 ; Dint3.1@119.605,113.294 cw(c118.922,112.612) 119.888,112.612 cw(c120.854,112.612) Dint3.1@120.171,113.294 ; Rint3.2@119.888,111.128 Dint3.1@119.888,113.577 Rint3.2@119.888,111.128
NetDint3_2: Dint3.2 KANAN2.33 KANAN.33 UV-TR1.3 | length 156.7
  Top Layer w0.35: Dint3.2@119.888,116.377 UV-TR1.3@124.542,116.377 ; Dint3.2@120.034,116.106 121.106,116.429 ; Dint3.2@120.034,116.648 121.106,116.326 ; Dint3.2@120.094,115.761 121.838,116.377 ; Dint3.2@120.094,116.993 121.838,116.377 ; Dint3.2@120.135,115.77 121.106,116.326 ; Dint3.2@120.135,116.985 121.106,116.429 ; Dint3.2@120.19,115.786 121.106,116.429 ; Dint3.2@120.19,116.969 121.106,116.326 ; Dint3.2@120.43,115.935 cw(c121.497,114.868) 121.497,116.377 cw(c121.497,117.886) Dint3.2@120.43,116.819 ; 122.551,116.377 cw(c122.551,113.534) UV-TR1.3@124.561,115.544 ; 123.396,116.377 cw(c123.396,114.379) UV-TR1.3@124.809,115.792 ; 124.241,116.377 cw(c124.241,115.224) UV-TR1.3@125.056,116.039 ; UV-TR1.3@124.649,115.473 123.913,116.309 ; UV-TR1.3@124.685,116.451 126.606,117.208 ; UV-TR1.3@124.715,116.468 126.122,116.835 ; UV-TR1.3@124.764,115.413 123.287,116.28 ; UV-TR1.3@124.767,115.412 123.005,116.377 ; UV-TR1.3@124.841,116.137 126.606,117.208 ; UV-TR1.3@124.845,116.14 126.122,116.835 ; UV-TR1.3@124.875,115.746 123.913,116.309 ; UV-TR1.3@124.908,115.734 123.005,116.377 ; UV-TR1.3@124.91,115.734 123.287,116.28 ; UV-TR1.3@124.968,116.176 ccw(c124.968,117.639) 126.003,116.605 ; UV-TR1.3@124.968,116.526 ccw(c124.968,118.834) 126.6,117.202 ; UV-TR1.3@124.982,116.526 123.287,116.28 ; UV-TR1.3@124.997,116.174 123.287,116.28 ; UV-TR1.3@125.003,116.173 123.005,116.377 ; UV-TR1.3@125.006,116.525 123.913,116.309 ; UV-TR1.3@125.008,116.525 123.005,116.377 ; UV-TR1.3@125.018,116.17 123.913,116.309 ; UV-TR1.3@125.115,115.78 126.606,117.208 ; UV-TR1.3@125.118,115.784 126.122,116.835 ; UV-TR1.3@125.378,115.548 126.606,117.208 ; UV-TR1.3@125.401,115.573 126.122,116.835 ; UV-TR1.3@125.543,115.951 cw(c126.011,115.951) 125.68,116.282 ; KANAN.33@144.315,119.126 cw(c142.927,119.126) 143.908,118.144 cw(c144.89,117.163) KANAN.33@144.89,118.551 ; KANAN.33@144.374,119.379 144.196,118.365 ; KANAN.33@144.399,119.426 144.129,118.432 ; KANAN.33@144.422,119.459 143.665,117.901 ; KANAN.33@144.708,119.259 144.196,118.365 ; KANAN.33@144.721,119.274 143.665,117.901 ; KANAN.33@144.721,119.275 144.129,118.432 ; KANAN.33@145.023,118.944 144.129,118.432 ; KANAN.33@145.038,118.957 143.665,117.901 ; KANAN.33@145.039,118.957 144.196,118.365 ; KANAN.33@145.143,118.61 144.129,118.432 ; KANAN.33@145.19,118.635 144.196,118.365 ; KANAN.33@145.223,118.658 143.665,117.901 ; Dint3.2@119.988,116.377 121.838,116.377 ; Dint3.2@119.988,116.377 121.106,116.326 ; Dint3.2@119.988,116.377 121.106,116.429 ; 121.106,116.326 120.009,116.103 121.838,116.377 ; 121.106,116.429 120.009,116.652 121.838,116.377 ; 123.005,116.377 UV-TR1.3@124.968,115.951 ; 123.287,116.28 UV-TR1.3@124.968,115.951 ; 123.913,116.309 UV-TR1.3@124.968,115.951 ; UV-TR1.3@124.968,115.951 126.606,117.208 ; UV-TR1.3@124.968,115.951 126.122,116.835 ; UV-TR1.3@124.968,115.951 125.349,115.951 127.299,117.901 143.665,117.901 ; 143.665,117.901 KANAN.33@144.89,119.126 ; 143.665,117.901 KANAN.33@144.89,119.126 ; 144.129,118.432 KANAN.33@144.89,119.126 ; 144.196,118.365 KANAN.33@144.89,119.126
  Bottom Layer w0.35: KANAN.33@144.925,118.904 145.919,119.173 ; KANAN.33@144.925,119.348 145.919,119.079 ; KANAN.33@144.982,118.558 146.685,119.126 ; KANAN.33@144.982,119.694 146.685,119.126 ; KANAN.33@145.025,118.567 145.919,119.079 ; KANAN.33@145.025,119.685 145.919,119.173 ; KANAN.33@145.076,118.582 145.919,119.173 ; KANAN.33@145.076,119.67 145.919,119.079 ; KANAN.33@145.297,118.719 cw(c146.278,117.738) 146.278,119.126 cw(c146.278,120.514) KANAN.33@145.297,119.533 ; KANAN2.33@151.306,119.326 151.085,117.901 ; KANAN2.33@151.307,118.924 cw(c150.401,118.585) 151.085,117.901 ; 151.469,118.285 ccw(c150.96,118.794) KANAN2.33@151.634,119.047 ; KANAN2.33@151.645,119.229 151.085,117.901 ; KANAN2.33@152.026,118.993 151.085,117.901 ; KANAN2.33@152.263,118.732 151.085,117.901 ; KANAN.33@144.89,119.126 145.919,119.173 ; KANAN.33@144.89,119.126 145.919,119.079 ; KANAN.33@144.89,119.126 146.685,119.126 ; 145.919,119.079 144.904,118.901 146.685,119.126 ; 145.919,119.173 144.904,119.351 146.685,119.126 ; 146.685,119.126 147.91,117.901 151.085,117.901 ; 151.085,117.901 KANAN2.33@151.845,119.126 151.845,118.661 151.085,117.901
NetDint4_1: Dint4.1 Rint4.2 | length 8.6
  Top Layer w0.8: Rint4.2@133.829,111.157 ccw(c133.146,111.84) 134.112,111.84 ccw(c135.078,111.84) Rint4.2@134.395,111.157 ; Dint4.1@133.829,113.379 cw(c133.146,112.696) 134.112,112.696 cw(c135.078,112.696) Dint4.1@134.395,113.379 ; Rint4.2@134.112,110.874 Dint4.1@134.112,113.662 Rint4.2@134.112,110.874
NetDint4_2: Dint4.2 KANAN2.32 KANAN.32 UV-TR.3 | length 155.1
  Top Layer w0.35: UV-TR.3@130.464,115.729 131.458,115.998 ; UV-TR.3@130.464,116.173 131.458,115.904 ; UV-TR.3@130.521,115.383 132.229,115.951 ; UV-TR.3@130.521,116.519 132.229,115.951 ; UV-TR.3@130.564,115.392 131.458,115.904 ; UV-TR.3@130.564,116.51 131.458,115.998 ; UV-TR.3@130.615,115.407 131.458,115.998 ; UV-TR.3@130.615,116.495 131.458,115.904 ; UV-TR.3@130.836,115.544 cw(c131.817,114.563) 131.817,115.951 cw(c131.817,117.339) UV-TR.3@130.836,116.358 ; 131.269,115.951 ccw(c131.269,119.205) Dint4.2@133.57,116.904 ; 132.114,115.951 ccw(c132.114,118.36) Dint4.2@133.818,116.656 ; 132.959,115.951 ccw(c132.959,117.515) Dint4.2@134.065,116.409 ; Dint4.2@133.601,115.951 UV-TR.3@130.429,115.951 ; Dint4.2@133.68,116.992 132.738,116.033 ; Dint4.2@133.768,117.038 132.003,115.951 ; Dint4.2@133.782,117.043 132.271,116.109 ; Dint4.2@133.898,116.712 132.738,116.033 ; Dint4.2@133.927,116.723 132.003,115.951 ; Dint4.2@133.937,116.726 132.271,116.109 ; Dint4.2@134.027,115.837 132.271,116.109 ; Dint4.2@134.046,116.189 132.271,116.109 ; Dint4.2@134.062,116.192 132.003,115.951 ; Dint4.2@134.068,115.84 132.738,116.033 ; Dint4.2@134.073,115.84 132.003,115.951 ; Dint4.2@134.073,116.194 132.738,116.033 ; Dint4.2@134.112,116.462 KANAN.32@142.226,116.462 ; Dint4.2@134.258,116.191 135.33,116.513 ; Dint4.2@134.258,116.733 135.33,116.411 ; Dint4.2@134.318,115.846 136.062,116.462 ; Dint4.2@134.318,117.078 136.062,116.462 ; Dint4.2@134.359,115.854 135.33,116.411 ; Dint4.2@134.359,117.07 135.33,116.513 ; Dint4.2@134.414,115.87 135.33,116.513 ; Dint4.2@134.414,117.054 135.33,116.411 ; Dint4.2@134.654,116.02 cw(c135.721,114.953) 135.721,116.462 cw(c135.721,117.971) Dint4.2@134.654,116.904 ; 140.662,116.462 ccw(c140.662,118.274) KANAN.32@141.943,116.993 ; 141.261,116.462 cw(c141.261,115.497) KANAN.32@141.943,116.179 ; 141.507,116.462 ccw(c141.507,117.429) KANAN.32@142.191,116.745 ; KANAN.32@142.06,117.083 141.511,116.429 ; KANAN.32@142.186,117.137 141.131,116.524 ; KANAN.32@142.22,117.146 140.54,116.462 ; KANAN.32@142.243,116.021 141.131,116.524 ; KANAN.32@142.259,116.018 141.511,116.429 ; KANAN.32@142.28,116.8 141.511,116.429 ; KANAN.32@142.298,116.013 140.54,116.462 ; KANAN.32@142.318,116.809 141.131,116.524 ; KANAN.32@142.321,116.809 140.54,116.462 ; KANAN.32@142.341,116.361 141.131,116.524 ; KANAN.32@142.351,116.361 140.54,116.462 ; KANAN.32@142.362,116.361 141.511,116.429 ; UV-TR.3@130.429,115.951 131.458,115.998 ; UV-TR.3@130.429,115.951 131.458,115.904 ; 131.458,115.904 130.443,115.726 132.229,115.951 ; 131.458,115.998 130.443,116.176 132.229,115.951 ; 132.003,115.951 Dint4.2@134.012,116.462 ; 132.271,116.109 Dint4.2@134.012,116.462 ; 132.738,116.033 Dint4.2@134.012,116.462 ; Dint4.2@134.212,116.462 136.062,116.462 ; Dint4.2@134.212,116.462 135.33,116.513 ; Dint4.2@134.212,116.462 135.33,116.411 ; 135.33,116.411 134.233,116.188 136.062,116.462 ; 135.33,116.513 134.233,116.736 136.062,116.462 ; 140.54,116.462 KANAN.32@142.35,116.586 ; 141.131,116.524 KANAN.32@142.35,116.586 ; 141.511,116.429 KANAN.32@142.35,116.586
  Bottom Layer w0.35: KANAN.32@142.017,117.054 143.575,117.811 ; KANAN.32@142.05,117.077 143.044,117.347 ; KANAN.32@142.096,117.102 143.111,117.28 ; KANAN.32@142.217,116.768 143.111,117.28 ; KANAN.32@142.35,117.161 ccw(c142.35,118.549) 143.332,117.568 ccw(c144.313,116.586) KANAN.32@142.925,116.586 ; KANAN.32@142.532,116.453 143.044,117.347 ; KANAN.32@142.818,116.253 143.575,117.811 ; KANAN.32@142.841,116.286 143.111,117.28 ; KANAN.32@142.866,116.333 143.044,117.347 ; KANAN2.32@148.898,116.179 ccw(c147.917,115.198) 147.917,116.586 ccw(c147.917,117.974) KANAN2.32@148.898,116.993 ; KANAN2.32@149.119,116.042 148.276,116.633 ; KANAN2.32@149.119,117.13 148.276,116.539 ; KANAN2.32@149.17,116.027 148.276,116.539 ; KANAN2.32@149.17,117.145 148.276,116.633 ; KANAN2.32@149.193,116.022 147.828,116.586 ; KANAN2.32@149.193,117.15 147.828,116.586 ; KANAN2.32@149.27,116.364 148.276,116.633 ; KANAN2.32@149.27,116.808 148.276,116.539 ; KANAN2.32@149.288,116.362 147.828,116.586 ; KANAN2.32@149.288,116.81 147.828,116.586 ; KANAN2.32@149.291,116.361 148.276,116.539 ; KANAN2.32@149.291,116.811 148.276,116.633 ; KANAN.32@142.35,116.586 143.044,117.347 ; KANAN.32@142.35,116.586 143.111,117.28 ; KANAN.32@142.35,116.586 143.575,117.811 ; 143.044,117.347 142.201,116.755 143.575,117.811 ; 143.111,117.28 142.519,116.437 143.575,117.811 ; 143.575,117.811 146.603,117.811 147.828,116.586 ; 147.828,116.586 KANAN2.32@149.305,116.586 ; 147.828,116.586 KANAN2.32@149.305,116.586 ; 148.276,116.539 KANAN2.32@149.305,116.586 ; 148.276,116.633 KANAN2.32@149.305,116.586
NetDPow_1: DPow.1 RPow.2 | length 18.5
  Top Layer w0.8: DPow.1@141.859,46.86 RPow.2@146.177,46.86 ; DPow.1@142.115,47.27 ccw(c143.104,48.259) 143.104,46.86 ; 142.742,46.908 141.832,46.987 145.039,46.86 RPow.2@146.077,46.86 ; 142.876,46.946 RPow.2@146.077,46.86 ; 142.877,46.86 RPow.2@146.077,46.86 ; RPow.2@145.794,46.577 ccw(c145.111,45.894) 145.111,46.86 ccw(c145.111,47.826) RPow.2@145.794,47.143
NetF1_1: F1.1 S1.2 | length 41.7
  Bottom Layer w0.8: F1.1@88.985,61.871 92.859,59.541 F1.1@90.529,63.415 ; F1.1@89.662,61.638 cw(c89.662,58.982) 91.54,60.86 cw(c93.418,62.738) F1.1@90.762,62.738 ; F1.1@89.662,62.738 100.076,52.324 ; S1.2@99.555,50.36 100.076,52.324 ; S1.2@99.566,50.415 100.033,51.231 ; S1.2@99.579,50.462 100.119,51.231 ; S1.2@99.705,50.663 ccw(c98.809,51.559) 100.076,51.559 ccw(c101.343,51.559) S1.2@100.447,50.663 ; S1.2@100.573,50.462 100.033,51.231 ; S1.2@100.586,50.415 100.119,51.231 ; S1.2@100.597,50.36 100.076,52.324 ; 100.033,51.231 S1.2@100.076,50.292 ; S1.2@100.076,50.292 100.119,51.231 ; S1.2@100.076,50.292 100.076,52.324